# Altium PCB PCB1.PcbDoc
Units mil, origin at the board's own origin, x right, y up, seen from the top; angles counter-clockwise.
Board outline 2055 x 840 mil, 2 copper layers (Top Layer, Bottom Layer); 7 components, 8 nets, 23 pads, 2 vias.
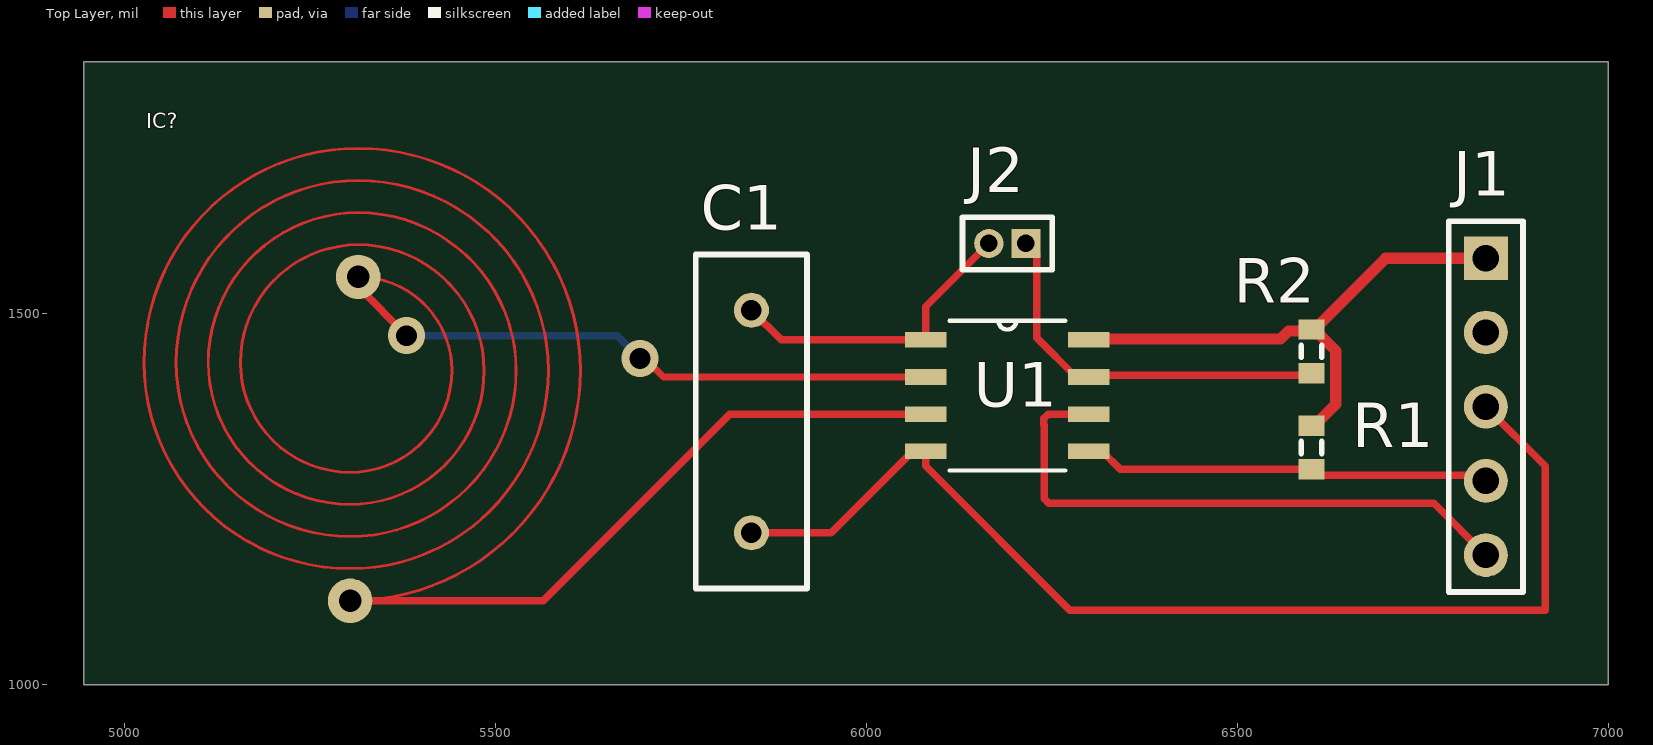
[diagram p0: Top Layer view]
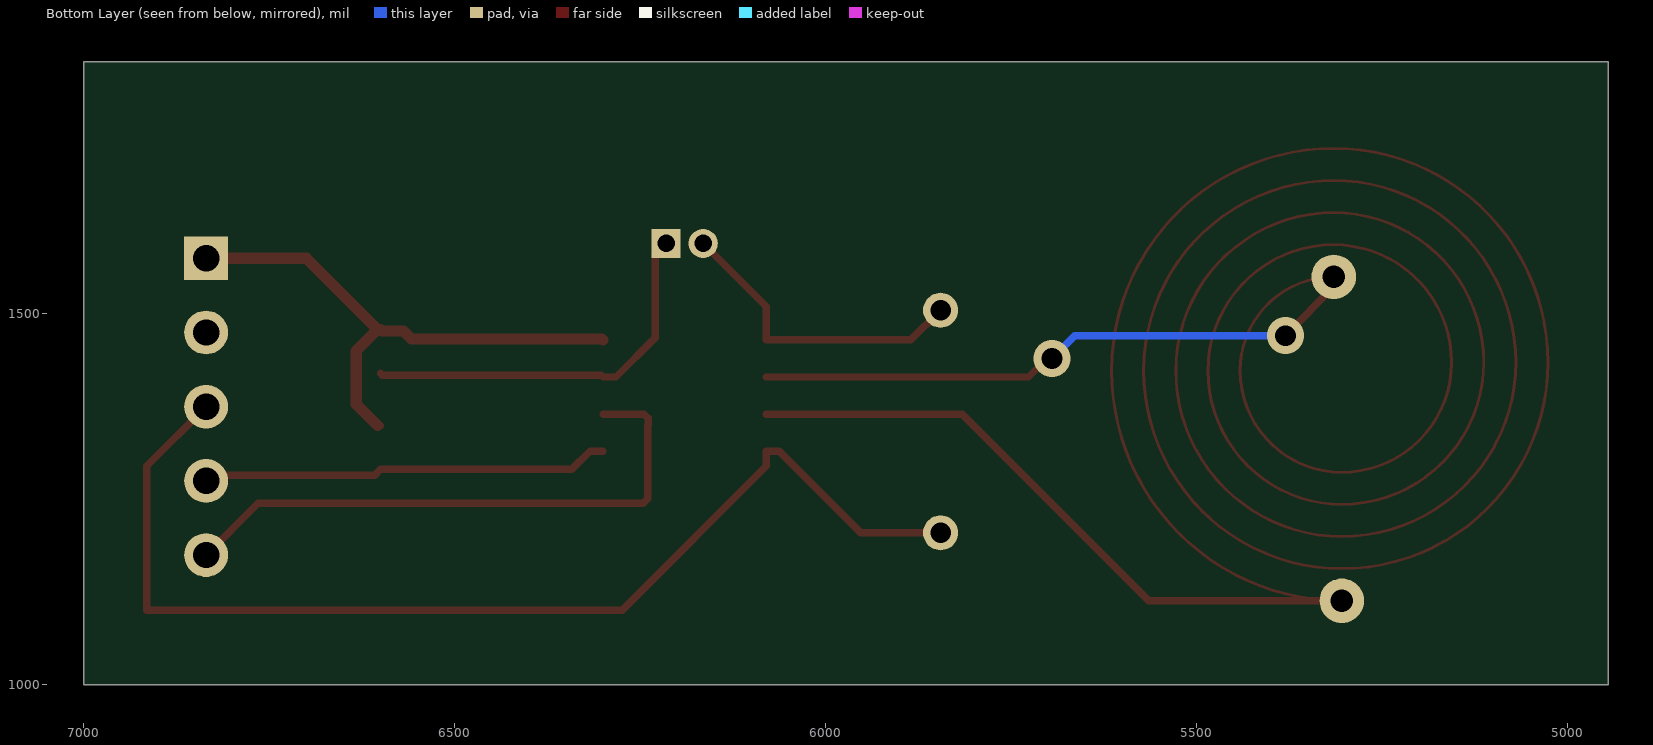
[diagram p1: Bottom Layer view, seen from below]

## Layer stack, top to bottom
Top Solder: solder mask 0.4, Solder Resist, Dk 3.5
Top Layer: signal copper 1.4
Dielectric 1: dielectric 12.6, FR-4, Dk 4.8
Bottom Layer: signal copper 1.4
Bottom Solder: solder mask 0.4, Solder Resist, Dk 3.5

## Board outline
4945,1000 7000,1000 7000,1840 4945,1840

## Design rules (kind name [scope] priority, off if disabled: settings)
Clearance [All] p1: gap=10 ignorepadtopadclearanceinfootprint=FALSE except(0: Arc-Hole Track-Hole SMDPad-Hole THPad-Hole Via-Hole Fill-Hole Poly-Hole Region-Hole Text-Hole)
PolygonConnect [All] p1: connectstyle=Relief reliefconductorwidth=10 reliefentries=4 polygonreliefangle="90 Angle" airgapwidth=10
RoutingVias [All] p1: holewidth=28 width=50 viastyle="Through Hole" minholewidth=28 minwidth=50 maxholewidth=28 maxwidth=50
SolderMaskExpansion [All] p1: expansion=4 istentingtop=FALSE
Width [All] p1: maxlimit=10 minlimit=10 preferedwidth=10
30 further rules are at their usual default settings.

## Components (designator, comment, footprint, x,y, rotation, side; value= is the part's Value field where it differs from the comment)
C1 "" RAD-0.3 5845,1355 r90 top value=10nF
IC? "Component_1" Antena 5320,1460 r180 top
J1 "Header 5" HDR1X5 6835,1575 r270 top
J2 "MHDR1X2" MHDR1X2 6215,1595 r180 top
R1 "OPEN" J1-0603 6600,1320 r90 top
R2 "" J1-0603 6600,1449.53 r90 top value=20k
U1 "M24LR64-RMN6/2" SOIC127P600X175-8N 6190,1390 r0 top

## Footprints (in the part's own frame and the unit in brackets; to place one, negate y for a bottom-side part, rotate by r counter-clockwise, add the part's x,y. Pads: shape width x height; smd on the part's side, far side on the other; paste and mask are expansions set on the pad)
Antena [mil] "Antena"
  round 60 hole 30: 1(5,-90) 2(15.83,346.65)
  Top Layer lines w3.94: 15.83,346.65 ccw(c15.83,36.3) -294.53,36.3 ccw(c5,36.3) 5,-263.23 ccw(c5,25.47) 293.7,25.47 ccw(c15.83,25.47) 15.83,303.35 ccw(c15.83,36.3) -251.22,36.3 ccw(c5,36.3) 5,-219.92 ccw(c5,25.47) 250.39,25.47 ccw(c15.83,25.47) 15.83,260.04 ccw(c15.83,36.3) -207.91,36.3 ccw(c5,36.3) 5,-176.61 ccw(c5,25.47) 207.09,25.47 ccw(c15.83,25.47) 15.83,216.73 ccw(c15.83,36.3) -164.61,36.3 ccw(c5,36.3) 5,-133.31 ccw(c5,25.47) 163.78,25.47 ccw(c15.83,25.47) 15.83,173.42 ccw(c15.83,36.3) -121.3,36.3 ccw(c5,36.3) 5,-90
HDR1X5 [mm] "Connector; Header; 5 Position"
  rect 1.5x1.5 hole 0.9: 1(0,0)
  round 1.5 hole 0.9: 2(2.54,0) 3(5.08,0) 4(7.62,0) 5(10.16,0)
  silkscreen extent -1.27,-1.27 11.43,1.27
J1-0603 [mm] "Chip Resistor, Body 1.6x0.8mm, IPC High Density"
  rect 0.7x0.9 smd: 1(-0.75,0) 2(0.75,0)
  silkscreen extent -0.2,-0.35 0.2,0.35, body extent -0.85,-0.48 0.85,0.48, height 0.9
MHDR1X2 [mm] "Connector; Header; 2 Position"
  rect 1x1 hole 0.6: 1(0,0)
  round 1 hole 0.6: 2(1.27,0)
  silkscreen extent -0.9,-0.9 2.17,0.9
RAD-0.3 [mm] "Radial Cap, Thru-Hole; 2 Leads; 0.3 in Pin Spacing"
  round 1.2 hole 0.7: 1(-3.81,0) 2(3.81,0)
  silkscreen extent -5.71,-1.91 5.71,1.91
SOIC127P600X175-8N [mil]
  rect 56x21 smd: 1(-110,75) 2(-110,25) 3(-110,-25) 4(-110,-75) 5(110,-75) 6(110,-25) 7(110,25) 8(110,75)
  silkscreen extent -78,-101 78,101

## Part data
C1: library part Cap, "Capacitor", LatestRevisionDate=17-Jul-2002, LatestRevisionNote="Re-released for DXP Platform.", PackageDescription="Radial Cap, Thru-Hole; 2 Leads; 0.3 in Pin Spacing", PackageReference=RAD-0.3, Published=8-Jun-2000, Publisher="Altium Limited"
IC?: "Antena"
J1: "Header, 5-Pin", LatestRevisionDate=17-Jul-2002, LatestRevisionNote="Re-released for DXP Platform.", Publisher="Altium Limited"
J2: "Header, 2-Pin", LatestRevisionDate=17-Jul-2002, LatestRevisionNote="Re-released for DXP Platform.", Publisher="Altium Limited"
R1 R2: library part Res3, "Resistor", LatestRevisionDate=29-May-2009, LatestRevisionNote="IPC-7351 Footprint Added.", PackageDescription="Chip Resistor", PackageReference=J1-0603, Published=8-Jun-2000, Publisher="Altium Limited"
U1: "64 Kbit EEPROM", Package=None, Availability=Unavailable, MP=M24LR64-RMN6-2, Price=None

## Via types
v1: diameter 50, hole 28, Top Layer to Bottom Layer, 2 vias

## Nets (pads, with @x,y where several pads share a name; then routed paths per layer and width w, separated by ;. In a path a pad name is that pad's centre, name@x,y a point inside that pad or via, vN(x,y) a via of type N, cw(c..) or ccw(c..) an arc to the next point about the centre after c; other vN are vias at no path point)
GND: C1.1 J1.3 U1.4 | length 1523.3
  Top Layer w10: C1.1 5952.5,1205 6062.5,1315 U1.4 6080,1295 6274.14,1100.86 6915,1100.86 6915,1295 J1.3
NetC1_2: C1.2 J2.2 U1.1 | length 416.8
  Top Layer w10: C1.2 5885,1465 U1.1 6080,1510 J2.2
NetIC?_1: IC?.1 U1.2 | length 830
  Top Layer w10: IC?.1 5315,1536.47 5380,1471.47 v1(5380,1470.74) v1@5380,1470 ; v1(5695,1440) 5701.57,1440 5726.57,1415 U1.2
  Bottom Layer w10: v1(5380,1470.74) 5664.26,1470.74 v1(5695,1440)
NetIC?_2: IC?.2 U1.3 | length 880.1
  Top Layer w10: IC?.2 5564.28,1113.35 5815.93,1365 U1.3
NetJ1_4: J1.4 R1.1 U1.5 | length 551.6
  Top Layer w10: U1.5 6317.5,1315 6342.03,1290.47 R1.1 6607.74,1282.74 6827.26,1282.74 J1.4
NetJ1_5: J1.5 U1.6 | length 798.3
  Top Layer w10: U1.6 6245,1365 6239.14,1359.14 6239.14,1350.86 6240,1350 6240,1250.86 6245.86,1245 6765,1245 J1.5
NetJ2_1: J2.1 R2.1 U1.7 | length 527.5
  Top Layer w10: J2.1 6229.69,1580.31 6229.69,1467.81 6282.5,1415 U1.7 6302.5,1417.5 6597.5,1417.5 R2.1
VCC: J1.1 R1.2 R2.2 U1.8 | length 737.9
  Top Layer w10: R1.2 R1.2@6603.94,1349.53 ; R2.2 R2.2@6603.94,1479.06
  Top Layer w15: U1.8 6301.38,1466.38 6558.19,1466.38 6568.78,1476.96 6597.91,1476.96 R2.2 ; R1.2@6603.94,1349.53 6632.72,1378.31 6632.72,1450.28 6603.94,1479.06 6699.88,1575 J1.1
pads on no net: J1.2